# EAGLE board board_wireless (EAGLE 9.6.2)

Size 132 x 78 mm. Coordinates in mm from the lower left corner, seen from the top.
Outline: 10,0 0,29 0,61 5,71 15,78 38,78 40,76 40,33 50,33 50,29 82,29 82,33 92,33 92,76 94,78 117,78 127,71 132,61 132,29 122,0 10,0
Outline: circle at 12.5,7 radius 2.5
Outline: circle at 119.5,7 radius 2.5
Copper layers (1*16): Top 0.035mm / dielectric 1.5mm / Bottom 0.035mm
Design rules "default": minimum track width 6mil, minimum drill 0.35mm, track to track 6mil, track to pad 6mil, pad to pad 6mil, via to via 6mil, smd to smd 6mil, copper to edge 40mil, drill to drill 6mil, minimum pad ring 10mil, minimum via ring 8mil, stop-mask expansion 4mil, vias tented up to drill 0mil, thermal gap 10mil

## Footprints (pad centres in the part's own frame; a part is rotated, then mirrored left to right if it is on the bottom)
DCPAD = smd 1.27 x 0.635: P$1 2.25,0.25; P$2 2.25,5.25

## Placement (x,y rotation side)
U$1  DCPAD  [DCPAD]  21.9,36.6 0 top
U$2  DCPAD  [DCPAD]  18,28.3 90 top
U$3  DCPAD  [DCPAD]  36,28.3 90 top
U$4  DCPAD  [DCPAD]  22.1,19 0 top
U$5  DCPAD  [DCPAD]  63.7,1.8 0 top
U$6  DCPAD  [DCPAD]  109.5,57.8 0 top
U$7  DCPAD  [DCPAD]  96.9,46.6 0 top
U$8  DCPAD  [DCPAD]  109.3,35.4 0 top
U$9  DCPAD  [DCPAD]  112.1,47.2 0 top

## Library data of the parts
U$1-U$9 = tawy